# EAGLE board Last (EAGLE 4.16)
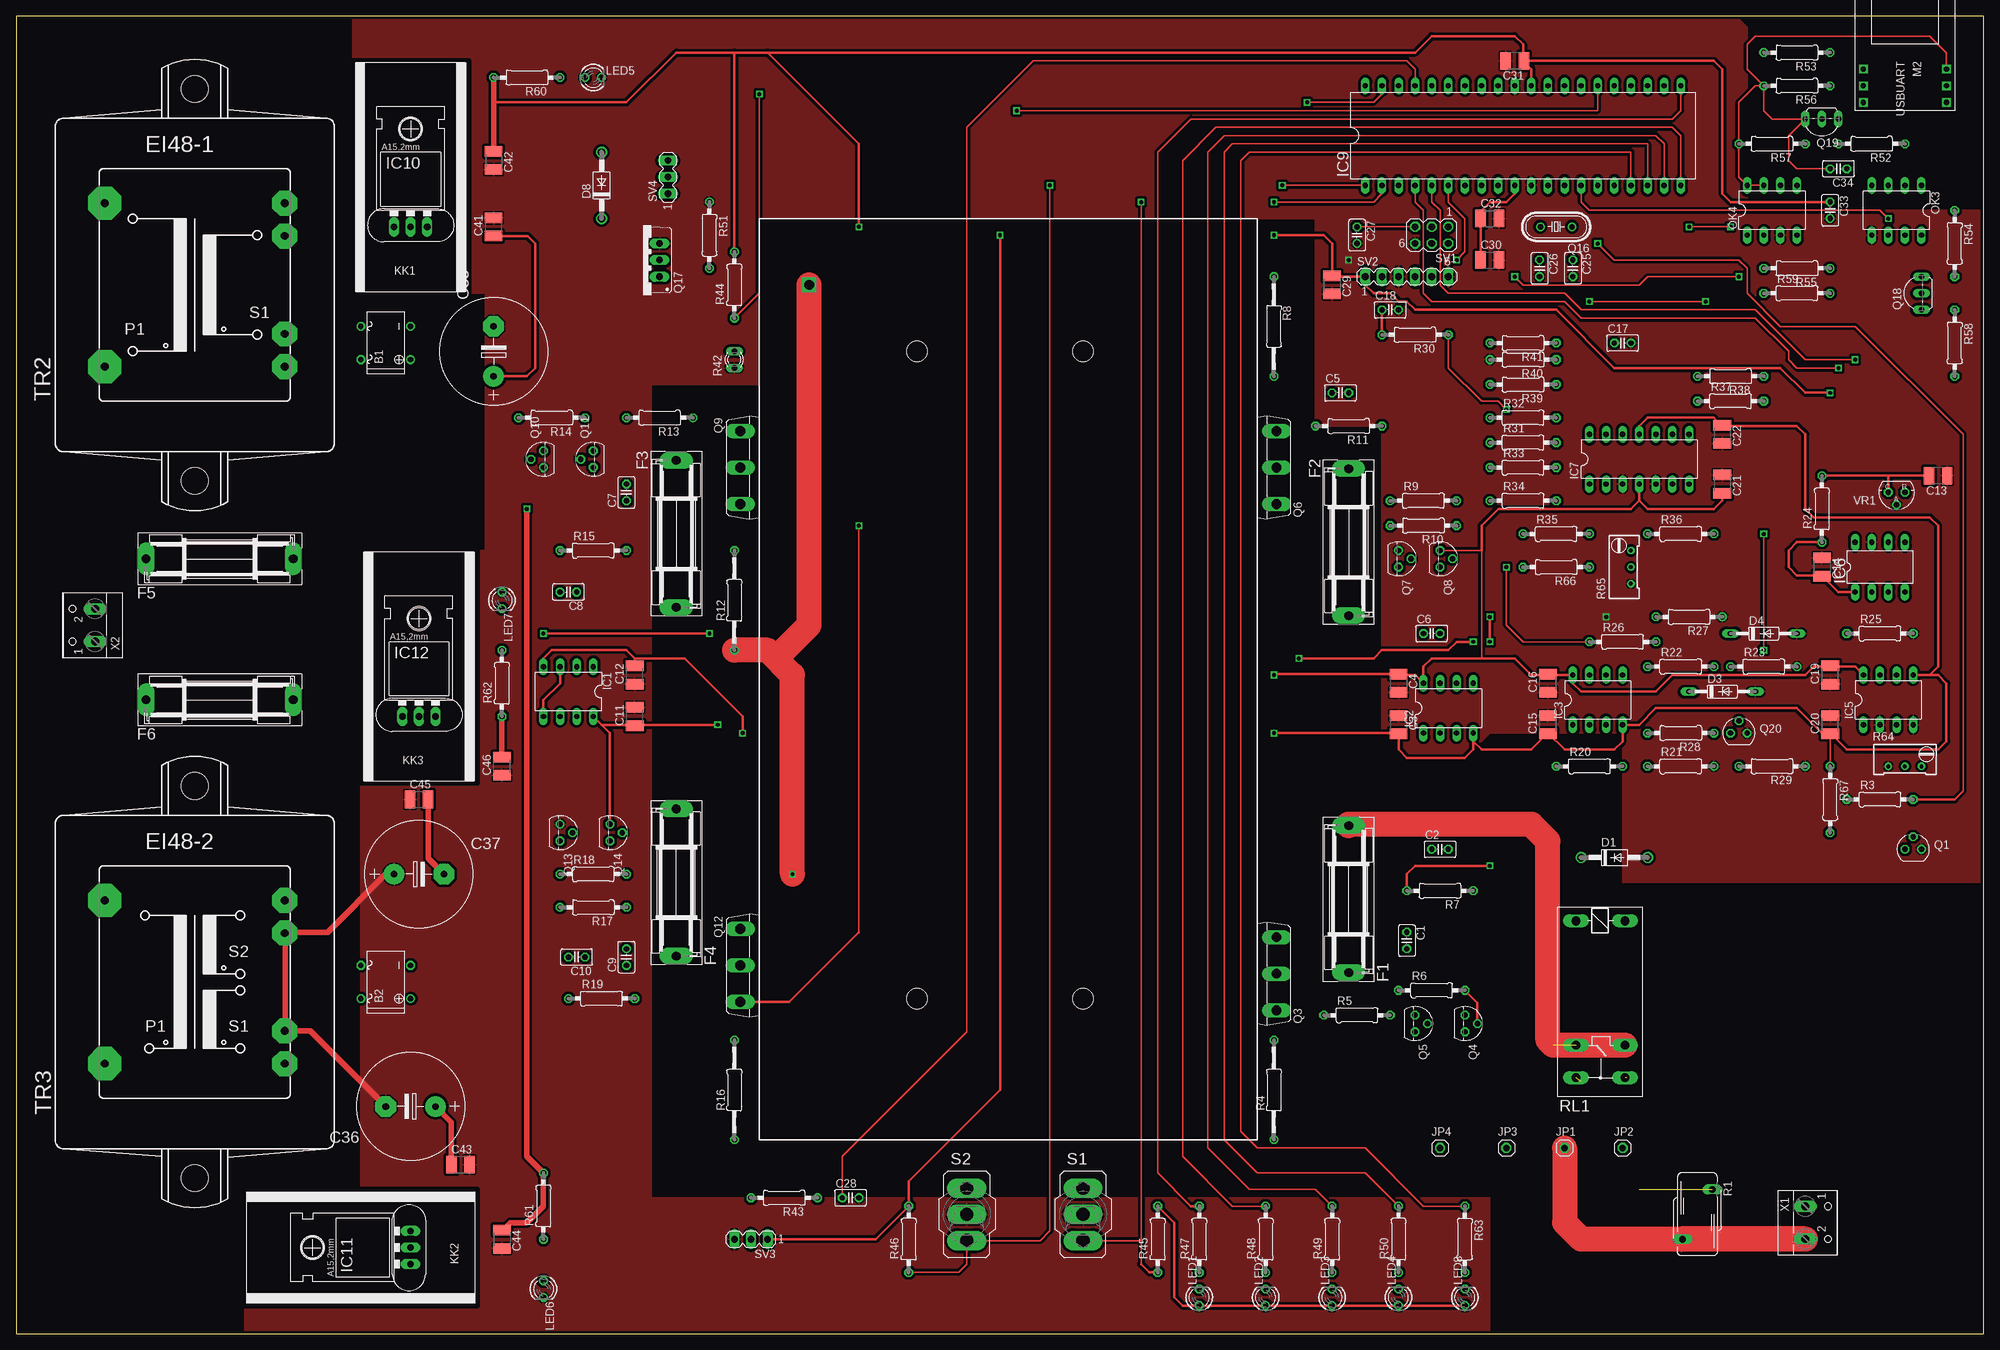
[diagram p0: board, top side]
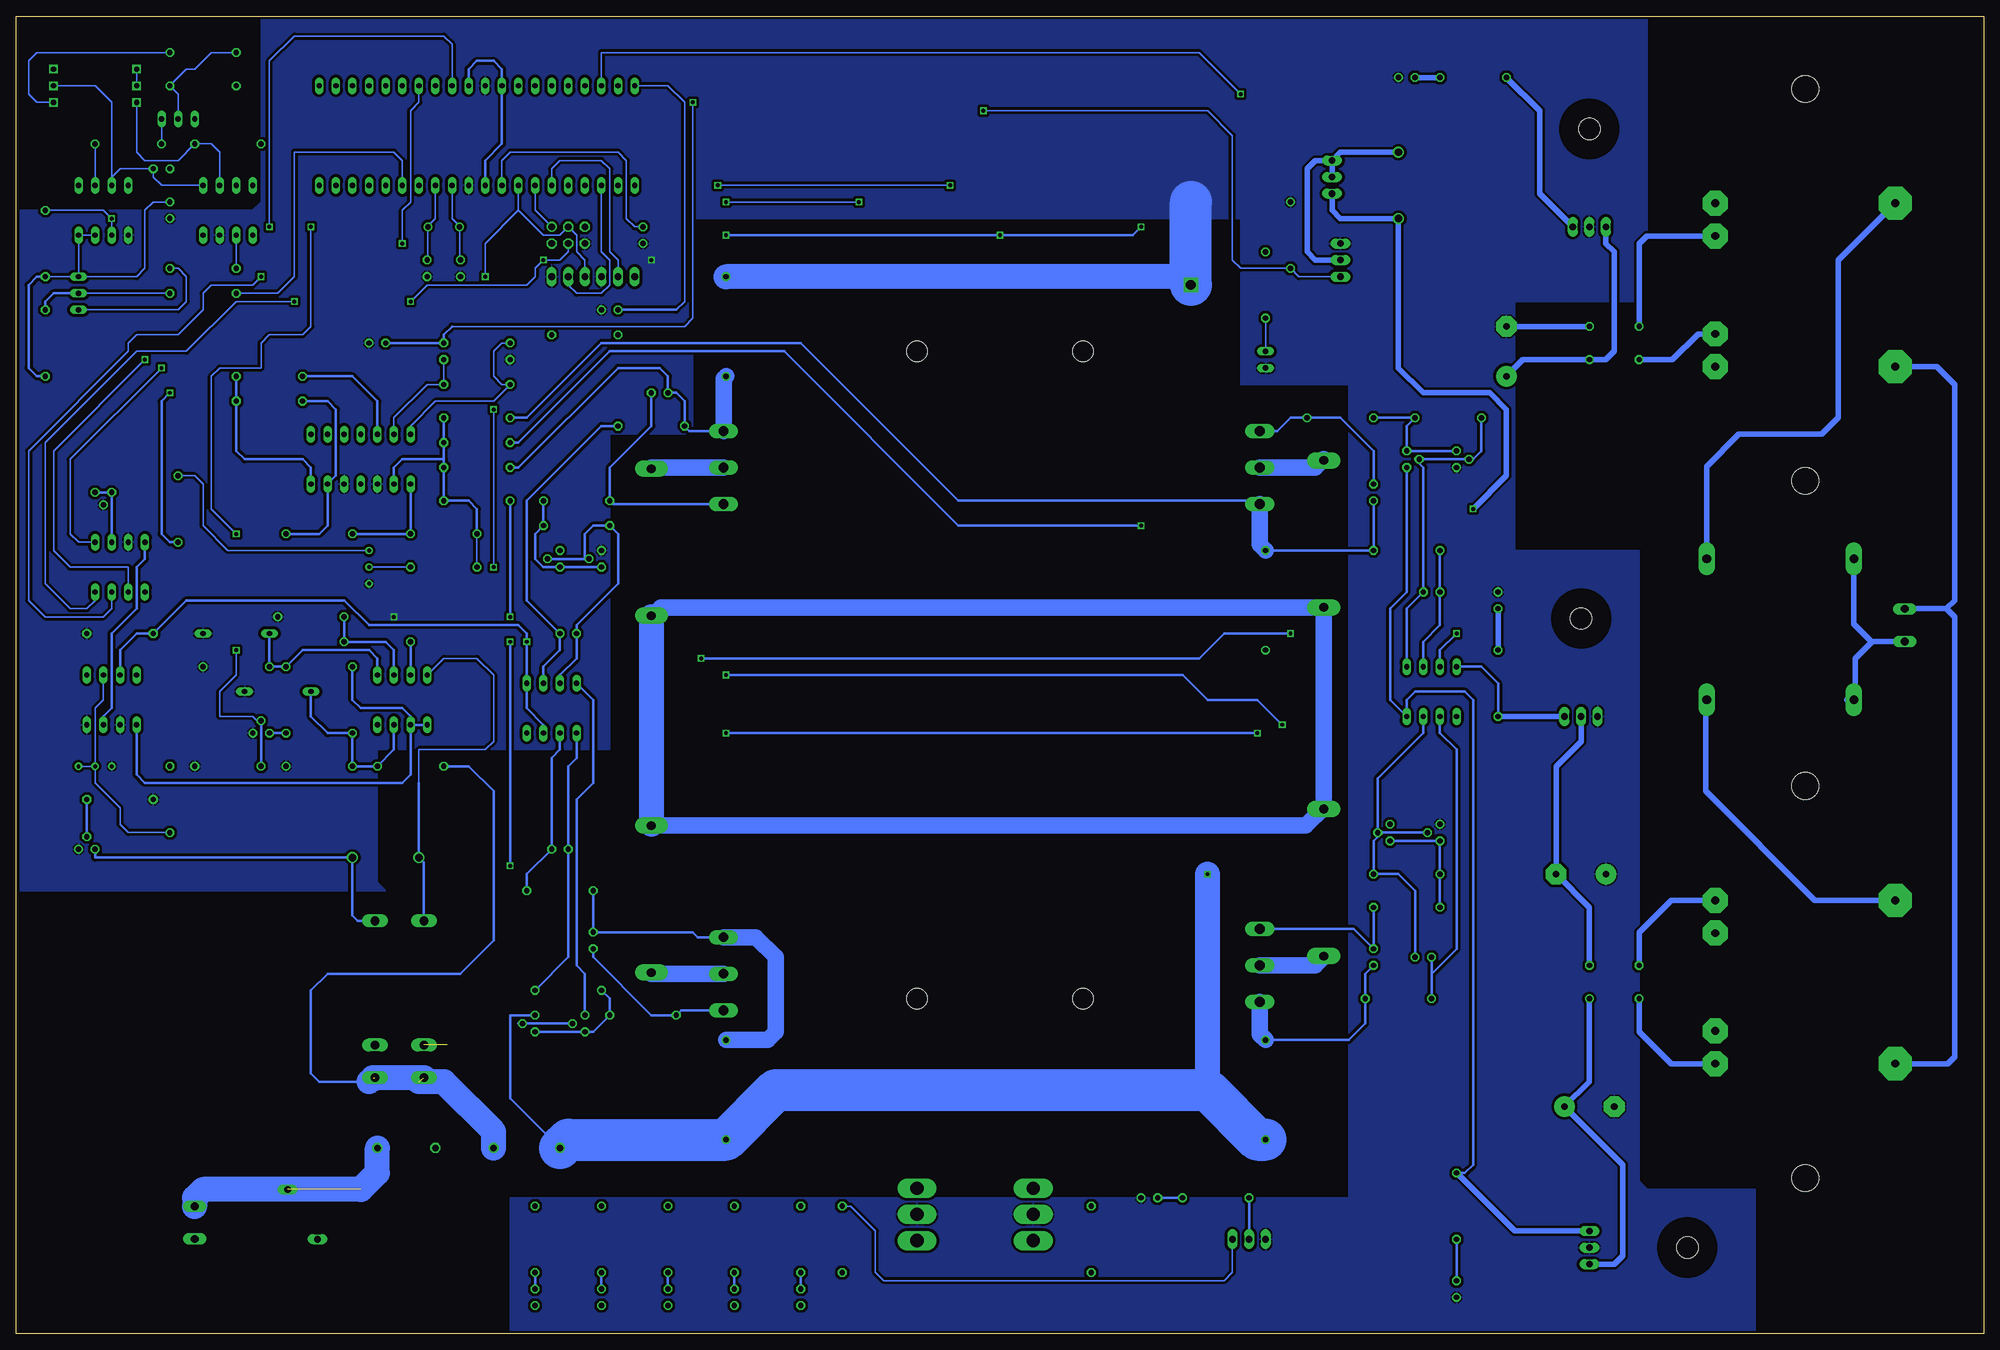
[diagram p1: board, bottom side, seen from below]

Size 300.97 x 201.6 mm. Coordinates in mm from the lower left corner, seen from the top.
Outline: 0,0 300.97,0 300.97,201.6 0,201.6 0,0
Copper layers (1*16): Top 0.035mm / dielectric 1.5mm / Bottom 0.035mm
Design rules "default": minimum track width 10mil, minimum drill 6mil, track to track 6mil, track to pad 6mil, pad to pad 6mil, via to via 6mil, smd to smd 6mil, copper to edge 6mil, drill to drill 6mil, minimum pad ring 10mil, minimum via ring 8mil, stop-mask expansion 4mil, vias tented up to drill 0mil, thermal gap 10mil
Holes 3.2 mm at 137.79,150.33 137.79,51.27 163.19,150.33 163.19,51.27

## Footprints (pad centres in the part's own frame; a part is rotated, then mirrored left to right if it is on the bottom)
B-DIL = drill 0.813 round: + -2.54,-3.81 | drill 0.813 octagon: - 2.54,-3.81; AC1 2.54,3.81; AC2 -2.54,3.81
C025-025X050 = drill 0.813 octagon: 1 -1.27,0; 2 1.27,0
C1210 = smd 1.6 x 2.7: 1 -1.4,0; 2 1.4,0
E7,5-16 = drill 1.016 pad 3.15 round: + -3.81,0 | drill 1.016 pad 3.15 octagon: - 3.81,0
DO41-10 = drill 1.118 round: A 5.08,0; C -5.08,0
DO35Z10 = drill 0.813 long: A 5.08,0; C -5.08,0
SH22,5 = drill 1.321 pad 2.54 long: 1 -11.252,0; 2 11.252,0
DIL08 = drill 0.813 long: 1 -3.81,-3.81; 2 -1.27,-3.81; 3 1.27,-3.81; 4 3.81,-3.81; 5 3.81,3.81; 6 1.27,3.81; 7 -1.27,3.81; 8 -3.81,3.81
DIL8 = drill 0.813 long: 1 -3.81,-3.81; 2 -1.27,-3.81; 3 1.27,-3.81; 4 3.81,-3.81; 5 3.81,3.81; 6 1.27,3.81; 7 -1.27,3.81; 8 -3.81,3.81
DIL14 = drill 0.813 long: 1 -7.62,-3.81; 2 -5.08,-3.81; 3 -2.54,-3.81; 4 0,-3.81; 5 2.54,-3.81; 6 5.08,-3.81; 7 7.62,-3.81; 8 7.62,3.81; 9 5.08,3.81; 10 2.54,3.81; 11 0,3.81; 12 -2.54,3.81; 13 -5.08,3.81; 14 -7.62,3.81
DIL40 = drill 0.813 long: 1 -24.13,-7.62; 2 -21.59,-7.62; 3 -19.05,-7.62; 4 -16.51,-7.62; 5 -13.97,-7.62; 6 -11.43,-7.62; 7 -8.89,-7.62; 8 -6.35,-7.62; 9 -3.81,-7.62; 10 -1.27,-7.62; 11 1.27,-7.62; 12 3.81,-7.62; 13 6.35,-7.62; 14 8.89,-7.62; 15 11.43,-7.62; 16 13.97,-7.62; 17 16.51,-7.62; 18 19.05,-7.62; 19 21.59,-7.62; 20 24.13,-7.62; 21 24.13,7.62; 22 21.59,7.62; 23 19.05,7.62; 24 16.51,7.62; 25 13.97,7.62; 26 11.43,7.62; 27 8.89,7.62; 28 6.35,7.62; 29 3.81,7.62; 30 1.27,7.62; 31 -1.27,7.62; 32 -3.81,7.62; 33 -6.35,7.62; 34 -8.89,7.62; 35 -11.43,7.62; 36 -13.97,7.62; 37 -16.51,7.62; 38 -19.05,7.62; 39 -21.59,7.62; 40 -24.13,7.62
78XXL = drill 1.016 long: GND 0,-3.81; IN -2.54,-3.81; OUT 2.54,-3.81 | hole 3.302: 0,11.176
79XXL = drill 1.016 long: GND -2.54,-3.81; IN 0,-3.81; OUT 2.54,-3.81 | hole 3.302: 0,11.176
1X01 = drill 1.016 octagon: 1 0,0
LED3MM = drill 0.813 octagon: A -1.27,0; K 1.27,0
USBUART = drill 0.8 square: 1 2.54,-6.35; 2 5.08,-6.35; 3 7.62,-6.35; 4 7.62,6.35; 5 5.08,6.35; 6 2.54,6.35
SOT54E = drill 0.813 octagon: D -1.27,0; G 0,1.905; S 1.27,0
TO247BV = drill 1.499 long: D 0,-2.921; G -5.588,-2.921; S 5.588,-2.921
TO92 = drill 0.813 octagon: 1 1.27,0; 2 0,1.905; 3 -1.27,0
HC49/S = drill 0.813 round: 1 -2.413,0; 2 2.413,0
TO220BV = drill 1.016 long: D 0,-2.54; G -2.54,-2.54; S 2.54,-2.54
TO92-EBC = drill 0.813 long: B 0,-1.27; C -2.54,-1.27; E 2.54,-1.27
S10K420 = drill 1.016 long: 1 -2.286,-3.81; 2 2.286,3.81
0207/10 = drill 0.813 octagon: 1 -5.08,0; 2 5.08,0
0207/15 = drill 0.813 octagon: 1 -7.62,0; 2 7.62,0
P640 = drill 0.813 long: 1 -1.27,0; 2 1.27,0
RTRIM64W = drill 0.61 round: 1 1.27,-2.54; 2 1.27,0; 3 1.27,2.54
FIN43619 = drill 1.321 long: 1 2.07,3.047; 2 2.07,10.54; P 21.06,3.047; P@ 21.06,10.54; S 26.064,3.047; S@ 26.064,10.54
320-916 = drill 2.007 long: 1 0,4.013; 2 0,0; 3 0,-4.013
MA03-2 = drill 1.016 round: 1 -2.54,-1.27 | drill 1.016 octagon: 2 -2.54,1.27; 3 0,-1.27; 4 0,1.27; 5 2.54,-1.27; 6 2.54,1.27
MA06-1 = drill 1.016 long: 1 -6.35,0; 2 -3.81,0; 3 -1.27,0; 4 1.27,0; 5 3.81,0; 6 6.35,0
MA03-1 = drill 1.016 long: 1 -2.54,0; 2 0,0; 3 2.54,0
EI48-1B = drill 1.194 pad 5.08 octagon: 1 -13.767,12.497; 6 -13.767,-12.497 | drill 1.194 pad 3.81 octagon: 7 13.767,-12.497; 8 13.767,-7.493; 11 13.767,7.493; 12 13.767,12.497 | hole 4.115: 0,-29.997; 0,29.997
EI48-2B = drill 1.194 pad 5.08 octagon: 1 -13.767,12.497; 6 -13.767,-12.497 | drill 1.194 pad 3.81 octagon: 7 13.767,-12.497; 8 13.767,-7.493; 11 13.767,7.493; 12 13.767,12.497 | hole 4.115: 0,-29.997; 0,29.997
TO92-CLP = drill 0.813 octagon: A 0,1.905; C 1.27,0; R -1.27,0
W237-102 = drill 1.194 long: 1 -2.5,-1.27; 2 2.5,-1.27

## Placement (x,y rotation side)
B1  VM25  [B-DIL]  56.51,151.6 90 top
B2  VM25  [B-DIL]  56.51,53.81 90 top
C1  4n7  [C025-025X050]  212.72,60.16 270 top
C2  2n7  [C025-025X050]  217.8,74.13 0 top
C3  1u  [C1210]  211.45,93.18 270 top
C4  1u  [C1210]  211.45,99.53 270 top
C5  4n7  [C025-025X050]  202.56,143.98 0 top
C6  2n7  [C025-025X050]  216.53,107.15 0 top
C7  4n7  [C025-025X050]  93.34,128.74 90 top
C8  2n7  [C025-025X050]  84.45,113.5 180 top
C9  4n7  [C025-025X050]  93.34,57.62 90 top
C10  2n7  [C025-025X050]  85.72,57.62 180 top
C11  1u  [C1210]  94.61,94.45 90 top
C12  1u  [C1210]  94.61,100.8 90 top
C13  10u  [C1210]  294,131.28 180 top
C14  1u  [C1210]  276.22,117.31 270 top
C15  1u  [C1210]  234.31,93.18 90 top
C16  1u  [C1210]  234.31,99.53 90 top
C17  10n  [C025-025X050]  245.74,151.6 0 top
C18  10n  [C025-025X050]  210.18,156.68 0 top
C19  1u  [C1210]  277.49,100.8 90 top
C20  1u  [C1210]  277.49,93.18 90 top
C21  1u  [C1210]  260.98,130.01 270 top
C22  1u  [C1210]  260.98,137.63 270 top
C25  22p  [C025-025X050]  238.12,163.03 270 top
C26  22p  [C025-025X050]  233.04,163.03 270 top
C27  100n  [C025-025X050]  205.1,168.11 270 top
C28  100n  [C025-025X050]  127.63,20.79 0 top
C29  10u  [C1210]  201.29,160.49 270 top
C30  1u  [C1210]  225.42,164.3 0 top
C31  1u  [C1210]  229.23,194.78 180 top
C32  1u  [C1210]  225.42,170.65 0 top
C33  100n  [C025-025X050]  277.49,171.92 270 top
C34  100n  [C025-025X050]  278.76,178.27 180 top
C35  2200u/35  [E7,5-16]  73.02,150.33 90 top
C36  2200u/35  [E7,5-16]  60.32,34.76 180 top
C37  2200u/35  [E7,5-16]  61.59,70.32 0 top
C41  10u  [C1210]  73.02,169.38 90 top
C42  10u  [C1210]  73.02,179.54 270 top
C43  10u  [C1210]  67.94,25.87 0 top
C44  10u  [C1210]  74.29,14.44 270 top
C45  10u  [C1210]  61.59,81.75 0 top
C46  10u  [C1210]  74.29,86.83 90 top
D1  1N4004  [DO41-10]  244.47,72.86 0 top
D3  BZX55C10  [DO35Z10]  260.98,98.26 0 top
D4  BZX55C3V3  [DO35Z10]  267.33,107.15 0 top
D8  1N4004  [DO41-10]  89.53,175.73 90 top
F1  2,5AT  [SH22,5]  203.83,66.51 90 top
F2  2,5AT  [SH22,5]  203.83,121.12 270 top
F3  2,5AT  [SH22,5]  100.96,122.39 270 top
F4  2,5AT  [SH22,5]  100.96,69.05 90 top
F5  100mAT  [SH22,5]  31.11,118.58 0 top
F6  100mAT  [SH22,5]  31.11,96.99 0 top
IC1  TL082P  [DIL08]  84.45,98.26 180 top
IC2  TL082P  [DIL08]  219.07,95.72 0 top
IC3  LT1078  [DIL08]  241.93,96.99 0 top
IC5  AD633  [DIL08]  286.38,96.99 0 top
IC6  MCP4921  [DIL8]  285.11,117.31 0 top
IC7  LT1079  [DIL14]  248.28,133.82 0 top
IC9  MEGA32-P  [DIL40]  230.5,183.35 0 top
IC10  7805  [78XXL]  60.32,173.19 0 top
IC11  7812  [78XXL]  56.51,13.17 90 top
IC12  7912  [79XXL]  61.59,98.26 0 top
JP1  [1X01]  236.85,28.41 0 top
JP2  [1X01]  245.74,28.41 0 top
JP3  [1X01]  227.96,28.41 0 top
JP4  [1X01]  217.8,28.41 0 top
KK1  SK13/35  [SK13/35]  60.32,173.19 270 top
KK2  SK13/35  [SK13/35]  56.51,13.17 0 top
KK3  SK13/35  [SK13/35]  61.59,98.26 270 top
LED1  [LED3MM]  180.97,5.55 90 top
LED2  [LED3MM]  191.13,5.55 90 top
LED3  [LED3MM]  201.29,5.55 90 top
LED4  [LED3MM]  211.45,5.55 90 top
LED5  [LED3MM]  88.26,192.24 0 top
LED6  [LED3MM]  80.64,6.82 270 top
LED7  [LED3MM]  74.29,112.23 270 top
LED8  [LED3MM]  221.61,5.55 90 top
M2  USBUART  [USBUART]  288.92,196.05 270 top
OK3  6N137  [DIL08]  287.65,171.92 180 top
OK4  6N137  [DIL08]  268.6,171.92 0 top
Q1  BS170  [SOT54E]  290.19,74.13 0 top
Q3  SPW32N50C3  [TO247BV]  189.86,55.08 90 top
Q4  BC557  [TO92]  221.61,47.46 270 top
Q5  BC547B  [TO92]  213.99,47.46 270 top
Q6  SPW32N50C3  [TO247BV]  189.86,132.55 90 top
Q7  BC557  [TO92]  211.45,118.58 270 top
Q8  BC547B  [TO92]  217.8,118.58 270 top
Q9  SPW32N50C3  [TO247BV]  113.66,132.55 270 top
Q10  BC557  [TO92]  80.64,133.82 90 top
Q11  BC547B  [TO92]  88.26,133.82 90 top
Q12  SPW32N50C3  [TO247BV]  113.66,56.35 270 top
Q13  BC557  [TO92]  83.18,76.67 270 top
Q14  BC547B  [TO92]  90.8,76.67 270 top
Q16  16MHz  [HC49/S]  235.58,169.38 180 top
Q17  IRF540  [TO220BV]  95.88,164.3 90 top
Q18  BC557C  [TO92-EBC]  290.19,159.22 90 top
Q19  BC557C  [TO92-EBC]  276.22,184.62 180 top
Q20  BS170  [SOT54E]  263.52,91.91 0 top
R1  B72214-S42  [S10K420]  257.17,18.25 180 top
R3  10k  [0207/10]  285.11,81.75 0 top
R4  0,1/1W  [0207/15]  192.4,37.3 90 top
R5  10  [0207/10]  205.1,48.73 0 top
R6  68  [0207/10]  216.53,52.54 0 top
R7  10k  [0207/10]  217.8,67.78 180 top
R8  0,1/1W  [0207/15]  192.4,154.14 270 top
R9  10  [0207/10]  215.26,127.47 0 top
R10  68  [0207/10]  215.26,123.66 180 top
R11  10k  [0207/10]  203.83,138.9 180 top
R12  0,1/1W  [0207/15]  109.85,112.23 90 top
R13  10  [0207/10]  98.42,140.17 180 top
R14  68  [0207/10]  81.91,140.17 180 top
R15  10k  [0207/10]  88.26,119.85 0 top
R16  0,1/1W  [0207/15]  109.85,37.3 90 top
R17  10  [0207/10]  88.26,65.24 180 top
R18  68  [0207/10]  88.26,70.32 0 top
R19  10k  [0207/10]  89.53,51.27 0 top
R20  470k 0,1%  [0207/10]  240.66,86.83 0 top
R21  82k 0,1%  [0207/10]  254.63,86.83 0 top
R22  9k  [0207/10]  254.63,102.07 0 top
R23  1k  [0207/10]  267.33,102.07 0 top
R24  10k  [0207/10]  276.22,126.2 90 top
R25  10k  [0207/10]  285.11,107.15 0 top
R26  22,6k  [0207/10]  245.74,105.88 0 top
R27  10k  [0207/10]  255.9,109.69 180 top
R28  7,87k 1%  [0207/10]  254.63,91.91 180 top
R29  10k  [0207/10]  268.6,86.83 180 top
R30  10k  [0207/10]  213.99,152.87 180 top
R31  10k  [0207/10]  230.5,136.36 0 top
R32  10k  [0207/10]  230.5,140.17 0 top
R33  10k  [0207/10]  230.5,132.55 0 top
R34  10k  [0207/10]  230.5,127.47 0 top
R35  10k  [0207/10]  235.58,122.39 0 top
R36  10k  [0207/10]  254.63,122.39 0 top
R37  10k  [0207/10]  262.25,142.71 0 top
R38  10k  [0207/10]  262.25,146.52 180 top
R39  33k  [0207/10]  230.5,145.25 180 top
R40  10k  [0207/10]  230.5,149.06 180 top
R41  10k  [0207/10]  230.5,151.6 180 top
R42  SAA965  [P640]  109.85,149.06 90 top
R43  10k  [0207/10]  117.47,20.79 180 top
R44  1k  [0207/10]  109.85,160.49 90 top
R45  1k  [0207/10]  174.62,14.44 90 top
R46  1k  [0207/10]  136.52,14.44 90 top
R47  2k2  [0207/10]  180.97,14.44 90 top
R48  2k2  [0207/10]  191.13,14.44 90 top
R49  2k2  [0207/10]  201.29,14.44 90 top
R50  2k2  [0207/10]  211.45,14.44 90 top
R51  10k  [0207/10]  106.04,168.11 270 top
R52  470  [0207/10]  283.84,182.08 180 top
R53  10k  [0207/10]  272.41,196.05 180 top
R54  1k  [0207/10]  296.54,166.84 270 top
R55  470  [0207/10]  272.41,163.03 180 top
R56  10k  [0207/10]  272.41,190.97 180 top
R57  1k  [0207/10]  268.6,182.08 180 top
R58  10k  [0207/10]  296.54,151.6 270 top
R59  10k  [0207/10]  272.41,159.22 0 top
R60  2k2  [0207/10]  78.1,192.24 180 top
R61  10k  [0207/10]  80.64,19.52 90 top
R62  10k  [0207/10]  74.29,99.53 90 top
R63  2k2  [0207/10]  221.61,14.44 270 top
R64  100  [RTRIM64W]  288.92,88.1 270 top
R65  100k  [RTRIM64W]  245.74,117.31 0 top
R66  470k  [0207/10]  235.58,117.31 180 top
R67  100k  [0207/10]  277.49,81.75 270 top
RL1  FIN43619  [FIN43619]  235.58,65.24 270 top
S1  [320-916]  163.19,18.25 0 top
S2  [320-916]  145.41,18.25 0 top
SV1  [MA03-2]  216.53,168.11 180 top
SV2  [MA06-1]  212.72,161.76 0 top
SV3  [MA03-1]  112.39,14.44 180 top
SV4  [MA03-1]  99.69,177 90 top
TR2  230V/8V 10VA  [EI48-1B]  27.3,160.49 0 top
TR3  230V/ 2* 12V 10VA  [EI48-2B]  27.3,53.81 0 top
VR1  TL431  [TO92-CLP]  287.65,128.74 180 top
X1  [W237-102]  274.95,16.98 270 top
X2  [W237-102]  10.79,108.42 90 top

## Library data of the parts
B1 B2 = rectifier
C1-C22 C25-C37 C41-C46 R3-R41 R43-R67 = rcl
D1 D3 D4 D8 = diode
F1-F6 = fuse
IC1-IC3 IC7 = linear
IC5 = analog-devices
IC6 = microchip
IC9 = atmel
IC10-IC12 VR1 = v-reg
JP1-JP4 = pinhead
KK1-KK3 = heatsink
LED1-LED8 = led
M2 = special
OK3 OK4 = optocoupler
Q1 Q20 = transistor-small-signal
Q3 Q6 Q9 Q12 Q17 = transistor-power
Q4 Q7 Q10 Q13 Q18 Q19 = transistor-pnp
Q5 Q8 Q11 Q14 = transistor-npn
Q16 = crystal
R1 = varistor
R42 = ptc-ntc
RL1 = relay
S1 S2 = switch
SV1-SV4 = con-lstb
TR2 TR3 = trafo
X1 X2 = con-wago-500

## Nets
+5V: C14.2 C29.1 C30.1 C31.1 C32.1 C33.1 C42.1 IC6.1 IC9.10 IC9.30 IC9.32 IC10.OUT LED1.A LED2.A LED3.A LED4.A LED8.A OK3.7 OK3.8 Q18.E R24.1 R44.2 R45.2 R46.2 R54.2 R58.2 R60.2 SV2.1 SV3.1
+12V: C4.1 C11.1 C16.2 C19.2 C21.2 C44.1 D1.C D8.C IC1.8 IC2.8 IC3.8 IC5.8 IC7.4 IC11.OUT Q5.3 Q8.3 Q11.3 Q14.3 R61.2 RL1.1 SV4.1
-12V: C3.2 C12.2 C15.1 C20.1 C22.1 C46.2 IC1.4 IC2.4 IC3.4 IC5.5 IC7.11 IC12.OUT R62.1 R67.1
CS_DAC: IC6.2 IC9.5
GAIN: IC9.29 Q20.G R29.2
GND: B1.- C3.1 C4.2 C11.2 C12.1 C13.1 C14.1 C15.2 C16.1 C17.2 C18.2 C19.1 C20.2 C21.1 C22.2 C25.2 C26.2 C27.2 C28.2 C29.2 C30.2 C31.2 C32.2 C33.2 C35.- C36.- C37.+ C41.2 C42.2 C43.2 C44.2 C45.1 C46.1 D3.A D4.A IC5.2 IC5.4 IC6.7 IC7.3 IC7.5 IC9.11 IC9.31 IC10.GND IC11.GND IC12.GND JP4.1 LED5.K LED6.K LED7.A OK3.5 OK4.3 Q1.S Q4.3 Q7.3 Q10.3 Q13.3 Q17.S Q20.S R3.1 R4.1 R8.1 R12.1 R16.1 R21.2 R23.2 R25.2 R27.1 R29.1 R40.2 R42.1 R51.1 R64.1 R65.1 S1.2 S2.2 SV1.6 SV2.3 SV2.6 SV3.3 TR3.8 TR3.11 VR1.A
I1IST: C9.1 Q12.S R16.2 R19.2 R31.1
I2IST: C7.1 Q9.S R12.2 R15.2 R32.1
I3IST: C5.1 Q6.S R8.2 R11.2 R33.1
I4IST: C1.1 Q3.S R4.2 R7.2 R34.1
IIST_ADC: C17.1 IC9.39 R41.1
ISOLL: IC1.3 IC1.5 IC2.3 IC2.5 IC5.7 R25.1
LDAC: IC6.5 IC9.4
MISO: IC9.7 SV1.1
MOSI: IC6.4 IC9.6 SV1.4 SV2.2
N$1: JP2.1 R1.1 X1.1
N$2: JP1.1 R1.2 X1.2
N$4: D1.A Q1.D RL1.2
N$6: IC5.6 R64.2 R64.3 R67.2
N$7: IC9.38 R42.2 R44.1
N$8: F1.1 Q3.D
N$10: D3.C IC3.3 R20.2 R21.1 R28.2
N$11: C1.2 Q3.G R5.1
N$12: Q4.1 Q5.1 R5.2 R6.1
N$13: C2.1 IC2.1 Q4.2 Q5.2 R6.2
N$14: Q20.D R28.1
N$15: C2.2 IC2.2 R7.1
N$16: F2.1 Q6.D
N$17: IC3.1 IC3.2 IC5.1 R22.1
N$18: C5.2 Q6.G R9.1
N$19: Q7.1 Q8.1 R9.2 R10.1
N$20: C6.1 IC2.7 Q7.2 Q8.2 R10.2
N$21: C6.2 IC2.6 R11.1
N$22: F3.1 Q9.D
N$23: D4.C IC3.5 R22.2 R23.1
N$24: C7.2 Q9.G R13.1
N$25: Q10.1 Q11.1 R13.2 R14.1
N$26: C8.1 IC1.1 Q10.2 Q11.2 R14.2
N$27: C8.2 IC1.2 R15.1
N$28: F4.1 Q12.D
N$29: IC5.3 IC6.8
N$30: C9.2 Q12.G R17.1
N$31: Q13.1 Q14.1 R17.2 R18.1
N$32: C10.1 IC1.7 Q13.2 Q14.2 R18.2
N$33: C10.2 IC1.6 R19.1
N$34: IC7.2 R31.2 R32.2 R33.2 R34.2 R35.1 R66.2
N$35: R65.2 R66.1
N$36: IC7.1 R35.2 R36.1
N$37: IC3.6 R26.2 R27.2
N$38: IC3.7 R26.1 R30.1
N$39: IC7.6 R36.2 R37.1
N$40: IC9.2 R45.1 S1.3
N$41: IC7.7 R37.2 R38.1
N$42: IC7.12 R38.2
N$44: IC7.13 R39.1 R40.1
N$45: IC7.14 R39.2 R41.2
N$46: R43.2 SV3.2
N$47: C28.1 IC9.37 R43.1
N$48: IC9.1 R46.1 S2.3
N$49: C26.1 IC9.12 Q16.2
N$50: C25.1 IC9.13 Q16.1
N$51: D8.A Q17.D SV4.2 SV4.3
N$52: C27.1 IC9.9 SV1.5
N$53: IC9.3 SV2.5
N$54: IC9.17 R63.1
N$55: IC9.26 Q17.G R51.2
N$56: LED1.K R47.1
N$57: IC9.21 R47.2
N$58: IC9.20 R48.2
N$59: LED2.K R48.1
N$60: IC9.19 R49.2
N$61: LED3.K R49.1
N$62: IC9.18 R50.2
N$63: LED4.K R50.1
N$64: Q19.C R52.2
N$65: C34.2 M2.6 OK4.7 OK4.8 Q19.E R56.2 R57.2
N$66: OK3.2 R52.1
N$67: M2.3 OK4.6 R57.1
N$68: Q19.B R53.2 R56.1
N$69: M2.4 R53.1
N$70: M2.1 M2.2
N$71: C34.1 M2.5 OK3.3 OK4.5
N$72: Q18.B R58.1 R59.2
N$73: OK4.2 R55.2
N$74: Q18.C R55.1
N$75: F5.1 F6.1 X2.1
N$76: F5.2 TR2.1
N$77: F6.2 TR3.1
N$78: TR2.6 TR3.6 X2.2
N$79: B1.AC1 TR2.11
N$80: B1.AC2 TR2.8
N$81: LED5.A R60.1
N$82: B1.+ C35.+ C41.1 IC10.IN
N$83: LED6.A R61.1
N$84: LED7.K R62.2
N$85: LED8.K R63.2
N$86: B2.AC1 TR3.12
N$87: B2.AC2 TR3.7
N$88: B2.+ C36.+ C43.1 IC11.IN
N$90: B2.- C37.- C45.2 IC12.IN
ON: IC9.27 Q1.G R3.2
RXD: IC9.14 OK3.6 R54.1
SCK: IC6.3 IC9.8 SV1.3 SV2.4
TXD: IC9.15 R59.1
U+: F1.2 F2.2 F3.2 F4.2 RL1.P RL1.P@
UIST: JP3.1 R20.1 RL1.S RL1.S@
UIST_ADC: C18.1 IC9.40 R30.2
VREF: C13.2 IC6.6 R24.2 R65.3 VR1.C VR1.R

## Tracks (layer width: path | path; a pad name or v marks a point on that pad's centre or on a via)
+5V  (via drill 0.6)
  Top 0.406: C33.1 262.25,173.19 260.98,174.46 260.98,193.51 259.71,194.78 C31.1 230.5,194.78 | IC9.30 231.77,193.51 230.5,194.78 | C30.1 224.02,170.52 224.15,170.65 C32.1 224.02,171.79 225.42,173.19 227.96,173.19 229.23,174.46 IC9.10 | 201.29,161.76 C29.1 | 201.29,161.76 SV2.1 206.37,160.49 207.64,159.22 210.18,159.22 211.45,157.95 212.72,157.95 213.99,156.68 235.58,156.68 244.47,147.79 269.87,147.79 273.68,143.98 v277.49,143.98 | 201.29,161.76 201.29,166.84 200.02,168.11 v192.4,168.11 | v128.9,169.38 128.9,182.08 114.93,196.05 | 109.85,196.05 100.96,196.05 93.34,188.43 73.02,188.43 | 109.85,196.05 R44.2 | 114.93,196.05 213.99,196.05 216.53,198.59 229.23,198.59 230.5,197.32 230.5,194.78 | 109.85,196.05 114.93,196.05 | LED8.A LED4.A LED3.A LED2.A LED1.A 178.43,4.28 177.16,5.55 177.16,16.98 R45.2 | v150.49,168.11 150.49,37.3 136.52,23.33 R46.2 131.44,14.44 SV3.1 | IC6.1 278.76,113.5 276.22,116.04 | R24.1 272.41,121.12 271.14,119.85 271.14,117.31 272.41,116.04 276.22,116.04 | 276.22,116.04 C14.2
  Top 0.813: R60.2 73.02,188.43 C42.1
  Bottom 0.254: Q18.E R54.2 | Q18.E OK3.8 OK3.7 | Q18.E 282.57,161.76 281.3,163.03 281.3,171.92 280.03,173.19 C33.1 | R45.2 173.35,19.52 169.54,15.71 169.54,9.36 168.27,8.09 116.2,8.09 114.93,9.36 SV3.1
  Bottom 0.406: IC9.30 231.77,193.51 230.5,194.78 227.96,194.78 226.69,193.51 IC9.32 226.69,182.08 229.23,179.54 IC9.10 | v192.4,168.11 v150.49,168.11 130.17,168.11 v128.9,169.38 | R54.2 297.81,161.76 299.08,160.49 299.08,147.79 297.81,146.52 R58.2 | R24.1 277.49,121.12 278.76,122.39 278.76,142.71 v277.49,143.98
  Bottom 0.813: IC10.OUT 67.94,174.46 67.94,187.16 R60.2
+12V  (via drill 0.6)
  Top 0.254: Q8.3 224.15,119.85 224.15,103.34
  Top 0.406: IC1.8 89.53,93.18 | 89.53,93.18 94.61,93.18 | Q14.3 90.8,91.91 89.53,93.18 | 94.61,93.18 C11.1 | 94.61,93.18 v107.31,93.18 | 234.31,100.8 C16.2 | 234.31,100.8 IC3.8 238.12,99.53 239.39,98.26 250.82,98.26 253.36,100.8 273.68,100.8 274.95,102.07 277.49,102.07 | 234.31,100.8 231.77,100.8 229.23,103.34 224.15,103.34 216.53,103.34 215.26,102.07 IC2.8 213.99,100.8 211.45,100.8 C4.1 192.53,100.93 v192.4,100.8 | IC5.8 281.3,102.07 277.49,102.07 | 277.49,102.07 C19.2 | C21.2 260.98,127.47 259.71,126.2 249.55,126.2 248.28,127.47 | 248.28,127.47 IC7.4 | 248.28,127.47 247.01,126.2 226.69,126.2 224.15,123.66 224.15,119.85
  Top 0.813: C44.1 74.29,15.71 75.56,16.98 78.1,16.98 80.64,19.52 R61.2 78.1,27.14 v78.1,126.2
  Bottom 0.254: 239.39,84.29 239.39,89.37 229.23,89.37 227.96,90.64 227.96,100.8 230.5,103.34 235.58,103.34 IC3.8
  Bottom 0.406: R61.2 79.37,24.6 78.1,25.87 78.1,96.99 79.37,98.26 86.99,98.26 88.26,96.99 IC1.8 90.8,96.99 90.8,110.96 88.26,113.5 Q11.3 | v107.31,93.18 111.12,96.99 118.74,96.99 122.55,100.8 v192.4,100.8 | Q5.3 213.99,55.08 215.26,56.35 215.26,81.75 212.72,84.29 212.72,96.99 IC2.8 | RL1.1 238.63,72.1 D1.C 239.39,84.29
  Bottom 0.813: IC11.OUT 71.75,15.71 R61.2 | SV4.1 99.69,171.92 98.42,170.65 D8.C 89.53,147.79 85.72,143.98 75.56,143.98 73.02,141.44 73.02,131.28 v78.1,126.2
-12V  (via drill 0.6)
  Top 0.254: 260.98,138.9 259.71,140.17 | 277.49,91.91 R67.1
  Top 0.406: 94.61,103.34 C12.2 | 94.61,103.34 93.34,104.61 81.91,104.61 80.64,103.34 IC1.4 | 94.61,103.34 102.23,103.34 111.12,94.45 v111.12,91.91 | 234.31,91.91 231.77,89.37 224.15,89.37 222.88,90.64 IC2.4 222.88,89.37 221.61,88.1 212.72,88.1 211.45,89.37 C3.2 211.45,91.91 v192.4,91.91 | 234.31,91.91 C15.1 | 234.31,91.91 236.85,89.37 244.47,89.37 245.74,90.64 IC3.4 248.28,93.18 250.82,95.72 272.41,95.72 276.22,91.91 277.49,91.91 | 292.73,100.8 294,100.8 295.27,99.53 295.27,90.64 294,89.37 280.03,89.37 277.49,91.91 | 292.73,100.8 IC5.5 | 277.49,91.91 C20.1 | IC7.11 248.28,138.9 249.55,140.17 259.71,140.17 | C22.1 260.98,138.9 272.41,138.9 273.68,137.63 273.68,126.2 274.95,124.93 292.73,124.93 294,123.66 294,102.07 292.73,100.8
  Top 0.813: 74.29,88.1 C46.2 R62.1
  Bottom 0.406: IC1.4 76.83,102.07 74.29,99.53 R62.1 | v192.4,91.91 v111.12,91.91
  Bottom 0.813: R62.1 IC12.OUT
CS_DAC  (via drill 0.6)
  Top 0.254: IC9.5 216.53,173.19 217.8,171.92 217.8,160.49 219.07,159.22 236.85,159.22 239.39,156.68 266.06,156.68 273.68,149.06 v281.3,149.06
  Bottom 0.254: IC6.2 283.84,117.31 292.73,117.31 295.27,119.85 295.27,135.09 v281.3,149.06
GAIN  (via drill 0.6)
  Top 0.254: v255.9,169.38 v262.25,169.38 | v267.33,104.61 v267.33,122.39
  Bottom 0.254: IC9.29 234.31,197.32 235.58,198.59 258.44,198.59 262.25,194.78 v262.25,169.38 | v255.9,169.38 255.9,154.14 257.17,152.87 262.25,152.87 263.52,151.6 263.52,147.79 269.87,147.79 271.14,146.52 271.14,126.2 v267.33,122.39 | v267.33,104.61 267.33,100.8 269.87,98.26 269.87,94.45 264.79,94.45 263.52,93.18
  Bottom 0.406: R29.2 263.52,93.18 Q20.G
GND  (via drill 0.6, 1.5)
  Top 0.406: C32.2 226.69,170.65 226.82,170.52
  Top 0.813: C37.+ 56.51,70.32 47.62,61.43 41.27,61.43 41.14,61.3 | 41.14,61.3 TR3.11 | 41.14,46.32 TR3.8 44.95,46.32 C36.- | 41.14,46.32 41.14,61.3 | 41.14,46.32 41.27,46.19
  Top 2.54: R12.1 117.47,104.61
  Top 3.81: v121.28,160.49 121.28,108.42 117.47,104.61 | R12.1 114.93,104.61 118.74,100.8 v118.74,70.32
  Bottom 0.406: Q4.3 225.42,48.73 225.42,37.3 225.42,36.03 JP4.1
  Bottom 0.813: B1.- C35.-
  Bottom 2.54: v121.28,160.49 122.55,161.76
  Bottom 3.81: 122.55,161.76 R8.1 | v118.74,70.32 118.74,38.57 R16.1
  Bottom 6.452: JP4.1 216.53,29.68 R4.1 184.78,37.3 118.74,37.3 111.12,29.68 R16.1 | v121.28,160.49 121.28,173.19
  other vias: 203.83,164.3 243.2,109.69
  pour Bottom (isolate 0.406): 51.43,201.13 51.43,157.95 71.75,157.95 71.75,119.85 52.7,119.85 52.7,23.33 51.43,22.06 34.92,22.06 34.92,0.47 225.42,0.47 225.42,20.79 97.15,20.79 97.15,145.25 113.66,145.25 113.66,170.65 197.48,170.65 197.48,137.63 210.18,137.63 210.18,89.37 245.74,89.37 245.74,69.05 244.47,67.78 300.35,67.78 300.35,171.92 264.79,171.92 263.52,173.19 263.52,201.13
  pour Top (isolate 0.406): 51.43,201.13 51.43,160.49 52.7,159.22 71.75,159.22 71.75,119.85 52.7,119.85 52.7,22.06 34.92,22.06 34.92,0.47 225.42,0.47 225.42,20.79 97.15,20.79 97.15,145.25 113.66,145.25 113.66,170.65 198.75,170.65 198.75,138.9 208.91,138.9 208.91,88.1 221.61,88.1 225.42,91.91 245.74,91.91 245.74,69.05 300.35,69.05 300.35,171.92 264.79,171.92 264.79,199.86 263.52,201.13
I1IST  (via drill 0.6)
  Top 0.254: v128.9,123.66 128.9,61.43
  Top 0.406: Q12.S 118.23,50.76 128.9,61.43
  Bottom 0.406: R16.2 97.15,44.92 94.61,47.46 R19.2 94.61,55.08 C9.1 | R31.1 224.15,136.36 210.18,150.33 183.51,150.33 156.84,123.66 v128.9,123.66
  Bottom 2.54: Q12.S 110.74,45.81 R16.2
I2IST
  Bottom 0.406: R12.2 R15.2 C7.1 | R32.1 222.88,140.17 211.45,151.6 180.97,151.6 156.84,127.47 112.39,127.47 111.12,126.2 110.74,126.2
  Bottom 2.54: Q9.S 110.74,126.2 110.74,120.74 R12.2
I3IST
  Bottom 0.406: Q6.S 197.99,138.14 R11.2 198.75,142.71 200.02,143.98 C5.1 201.29,146.52 202.56,147.79 208.91,147.79 224.15,132.55 R33.1
  Bottom 2.54: Q6.S 192.78,146.14 R8.2
I4IST  (via drill 0.6)
  Top 0.406: v225.42,105.88 v225.42,109.69 | v225.42,71.59 213.99,71.59 212.72,70.32 R7.2
  Bottom 0.406: R7.2 C1.1 197.48,61.43 196.72,60.67 Q3.S | v225.42,109.69 R34.1 | v225.42,71.59 v225.42,105.88
  Bottom 2.54: R4.2 186.05,44.92 184.78,46.19 184.78,57.62 187.83,60.67 Q3.S
IIST_ADC  (via drill 0.6)
  Top 0.254: v197.48,188.43 207.64,188.43 208.91,189.7 IC9.39
  Bottom 0.254: 234.31,154.14 198.75,154.14 197.48,155.41 v197.48,188.43
  Bottom 0.406: 234.31,154.14 235.58,152.87 R41.1 C17.1
ISOLL  (via drill 0.6)
  Top 0.406: IC1.5 80.64,96.99 83.18,99.53 IC1.3 | v222.88,105.88 220.34,105.88 219.07,104.61 208.91,104.61 207.64,103.34 v196.21,103.34 | v106.04,107.15 v80.64,107.15
  Bottom 0.406: IC1.3 83.18,104.61 v80.64,107.15 | IC2.3 220.34,93.18 222.88,95.72 IC2.5 v222.88,105.88 222.88,107.15 224.15,108.42 247.01,108.42 250.82,112.23 274.95,112.23 R25.1 282.57,107.15 285.11,104.61 IC5.7 | v196.21,103.34 120.01,103.34 116.2,107.15 v106.04,107.15
LDAC  (via drill 0.6)
  Top 0.254: IC9.4 213.99,173.19 215.26,171.92 215.26,159.22 216.53,157.95 236.85,157.95 239.39,155.41 266.06,155.41 271.14,150.33 271.14,149.06 272.41,147.79 v278.76,147.79
  Bottom 0.254: IC6.5 291.46,121.12 292.73,122.39 292.73,133.82 v278.76,147.79
MISO
  Bottom 0.254: IC9.7 221.61,171.92 SV1.1
MOSI  (via drill 0.6)
  Top 0.254: IC9.6 219.07,173.19 221.61,170.65 221.61,165.57 v220.34,164.3 | v240.66,157.95 v258.44,157.95
  Bottom 0.254: SV2.2 208.91,164.3 210.18,165.57 210.18,178.27 211.45,179.54 217.8,179.54 219.07,178.27 IC9.6 | IC6.4 288.92,112.23 290.19,110.96 292.73,110.96 296.54,114.77 296.54,136.36 282.57,150.33 274.95,150.33 267.33,157.95 v258.44,157.95 | SV1.4 216.53,165.57 217.8,164.3 v220.34,164.3 221.61,163.03 221.61,161.76 222.88,160.49 238.12,160.49 v240.66,157.95
N$1  (1 unrouted)
  Bottom 3.81: X1.1 273.68,20.79 272.41,22.06 248.28,22.06 245.74,24.6 JP2.1
N$2
  Top 3.81: R1.2 254.63,14.44 254.67,14.48 X1.2 239.35,14.48 236.85,16.98 JP1.1
N$4
  Bottom 0.406: Q1.D 288.92,72.86 D1.A 249.55,63.97 248.75,63.17 RL1.2
N$6
  Bottom 0.254: R64.2 R64.3 | IC5.6 287.65,96.99 288.92,95.72 R64.2 | R67.2 283.84,76.67 285.11,77.94 285.11,80.48 288.92,84.29 R64.2
N$7  (via drill 0.6)
  Top 0.254: v113.66,189.7 113.66,159.22 R44.1
  Bottom 0.254: R42.2 R44.1 | IC9.38 211.45,196.05 120.01,196.05 v113.66,189.7
N$8
  Bottom 2.54: F1.1 203.83,55.08 Q3.D
N$10
  Bottom 0.406: D3.C 255.9,94.45 253.36,91.91 R28.2 R21.1 R20.2 243.2,89.37 IC3.3
N$11
  Bottom 0.406: Q3.G 199.26,49.49 R5.1 203.83,48.73 212.72,57.62 C1.2
N$12
  Bottom 0.406: R6.1 210.18,51.27 R5.2 212.72,46.19 Q5.1 Q4.1
N$13
  Top 0.406: Q4.2 223.51,50.63 R6.2
  Bottom 0.406: Q5.2 Q4.2 224.15,47.46 | R6.2 216.53,57.62 C2.1 216.53,86.83 215.26,88.1 IC2.1
N$14
  Bottom 0.406: R28.1 Q20.D
N$15
  Bottom 0.406: R7.1 222.88,70.32 C2.2 219.07,88.1 217.8,89.37 IC2.2
N$16
  Bottom 2.54: F2.1 203.83,132.55 Q6.D
N$17
  Bottom 0.406: IC3.2 IC3.1 | R22.1 249.55,96.99 248.28,95.72 241.93,95.72 240.66,94.45 IC3.2 | IC5.1 282.57,85.56 281.3,84.29 241.93,84.29 240.66,85.56 IC3.2
N$18
  Bottom 0.406: Q6.G 209.67,126.96 R9.1 210.18,132.55 203.83,138.9 C5.2
N$19
  Bottom 0.406: R9.2 R10.1 221.61,122.39 221.61,118.58 220.34,117.31 Q8.1 Q7.1
N$20
  Bottom 0.406: 213.99,118.58 213.99,122.39 212.72,123.66 R10.2 208.91,122.39 208.91,114.77 215.26,108.42 C6.1 215.26,103.34 217.8,100.8 IC2.7 | 213.99,118.58 Q8.2 | 213.99,118.58 Q7.2
N$21
  Bottom 0.406: IC2.6 220.34,102.07 217.8,104.61 C6.2 222.88,112.23 222.88,127.47 211.45,138.9 R11.1
N$22
  Bottom 2.54: F3.1 100.96,133.82 102.23,132.55 Q9.D
N$23
  Bottom 0.406: D4.C R23.1 R22.2 257.17,104.61 247.01,104.61 245.74,103.34 IC3.5
N$24
  Bottom 0.406: Q9.G 108.07,138.14 106.04,140.17 R13.1 98.42,140.17 93.34,135.09 C7.2
N$25
  Bottom 0.406: R13.2 R14.1 88.26,138.9 Q11.1 Q10.1
N$26
  Bottom 0.406: R14.2 76.83,135.09 78.1,133.82 Q10.2 79.37,133.82 Q11.2 86.99,133.82 85.72,132.55 C8.1 88.26,110.96 IC1.1
N$27
  Bottom 0.406: R15.1 C8.2 83.18,108.42 85.72,105.88 IC1.2
N$28
  Bottom 2.54: F4.1 100.96,57.62 102.23,56.35 Q12.D
N$29
  Bottom 0.406: IC5.3 287.65,94.45 286.38,95.72 286.38,107.15 282.57,110.96 282.57,117.31 281.3,118.58 IC6.8
N$30
  Bottom 0.406: Q12.G 96.39,61.94 C9.2 R17.1
N$31
  Bottom 0.406: R17.2 R18.1 Q13.1 Q14.1
N$32
  Bottom 0.406: 92.07,76.67 93.34,75.4 R18.2 89.53,70.32 86.99,67.78 C10.1 | 92.07,76.67 Q13.2 | IC1.7 85.72,91.91 92.7,84.92 Q14.2 92.07,76.67
N$33
  Bottom 0.406: C10.2 R19.1 84.45,55.08 80.64,58.89 80.64,89.37 83.18,91.91 IC1.6
N$34
  Bottom 0.254: R66.2 R35.1
  Bottom 0.406: R31.2 R32.2 235.58,133.82 | 235.58,133.82 R33.2 R34.2 231.77,127.47 230.5,126.2 R35.1 | IC7.2 243.2,132.55 241.93,133.82 235.58,133.82
N$35
  Bottom 0.254: R66.1 R65.2
N$36
  Bottom 0.406: IC7.1 R35.2 R36.1
N$37
  Bottom 0.406: IC3.6 243.2,104.61 244.47,105.88 R26.2 R27.2
N$38  (via drill 0.6)
  Top 0.254: R26.1 230.5,105.88 227.96,108.42 v227.96,117.31 | v227.96,141.44 226.69,142.71 224.15,142.71 219.07,147.79 R30.1
  Bottom 0.254: v227.96,117.31 v227.96,141.44
  Bottom 0.406: R26.1 IC3.7
N$39
  Bottom 0.406: R36.2 254.63,122.39 253.36,123.66 IC7.6 252.09,131.28 252.09,141.44 253.36,142.71 R37.1
N$40  (via drill 0.6)
  Top 0.254: v172.08,173.19 172.08,14.44 | 172.08,14.44 172.08,10.63 | v192.4,173.19 207.64,173.19 208.91,174.46 IC9.2 | S1.3 171.88,14.24 172.08,14.44
  Top 0.406: R45.1 173.35,9.36 172.08,10.63
  Bottom 0.254: v172.08,173.19 v192.4,173.19
N$41
  Bottom 0.406: R38.1 R37.2 267.33,135.09 266.06,133.82 257.17,133.82 255.9,132.55 IC7.7
N$42
  Top 0.254: R38.2 256.84,146.19
  Bottom 0.406: IC7.12 245.74,142.71 249.55,146.52 R38.2
N$44
  Bottom 0.254: R40.1 R39.1 238.12,145.25 243.2,140.17 IC7.13
N$45
  Bottom 0.254: R41.2 226.69,151.6 227.96,150.33 227.96,146.52 226.69,145.25 R39.2 227.96,142.71 236.85,142.71 240.66,138.9 IC7.14
N$46
  Bottom 0.406: SV3.2 R43.2
N$47
  Top 0.254: IC9.37 213.99,193.51 212.72,194.78 155.57,194.78 145.41,184.62 145.41,46.19 135.25,36.03 126.36,27.14 C28.1
  Bottom 0.406: C28.1 R43.1
N$48  (via drill 0.6)
  Top 0.254: v158.11,175.73 158.11,15.71 156.64,14.24 S2.3 | v193.67,175.73 IC9.1 | R46.1 144.14,9.36 145.41,10.63 S2.3 | S2.3 145.41,14.44
  Bottom 0.254: v158.11,175.73 v193.67,175.73
N$49
  Bottom 0.254: IC9.12 234.31,170.65 233.04,169.38 Q16.2 233.17,164.43 C26.1
N$50
  Bottom 0.254: IC9.13 236.85,170.65 238.12,169.38 Q16.1 237.99,164.43 C25.1
N$51
  Bottom 0.813: D8.A 98.42,180.81 SV4.3 | SV4.3 SV4.2 | Q17.D 102.23,164.3 103.5,165.57 103.5,178.27 102.23,179.54 SV4.3
N$52
  Top 0.254: C27.1 SV1.5
  Bottom 0.254: IC9.9 226.69,179.54 225.42,180.81 208.91,180.81 207.64,179.54 207.64,170.65 206.37,169.38 C27.1
N$53
  Bottom 0.254: SV2.5 216.53,160.49 215.26,159.22 211.45,159.22 210.18,160.49 210.18,164.3 211.45,165.57 IC9.3
N$54
  Top 0.254: IC9.17 247.01,180.81 188.59,180.81 187.32,179.54 187.32,30.95 189.86,28.41 206.37,28.41 215.26,19.52 R63.1
N$55  (via drill 0.6)
  Top 0.254: IC9.26 241.93,187.16 v153.03,187.16
  Bottom 0.254: Q17.G 104.77,161.76 R51.2 113.66,163.03 114.93,164.3 114.93,183.35 118.74,187.16 v153.03,187.16
N$56
  Bottom 0.406: LED1.K R47.1
N$57
  Top 0.254: IC9.21 254.63,187.16 253.36,185.89 179.7,185.89 174.62,180.81 174.62,24.6 179.7,19.52
  Top 0.406: 179.7,19.52 R47.2
N$58
  Top 0.254: IC9.20 254.63,183.35 253.36,184.62 183.51,184.62 178.43,179.54 178.43,27.14 186.05,19.52 R48.2
N$59
  Bottom 0.406: LED2.K R48.1
N$60
  Top 0.254: IC9.19 252.09,182.08 250.82,183.35 184.78,183.35 182.24,180.81 182.24,28.41 188.59,22.06 198.75,22.06 R49.2
N$61
  Bottom 0.406: LED3.K R49.1
N$62
  Top 0.254: IC9.18 249.55,182.08 186.05,182.08 184.78,180.81 184.78,84.29 184.78,29.68 189.86,24.6 206.37,24.6 R50.2
N$63
  Bottom 0.406: LED4.K R50.1
N$64
  Bottom 0.254: R52.2 Q19.C
N$65
  Top 0.254: M2.6 295.27,196.05 292.73,198.59 266.06,198.59 264.79,197.32 264.79,193.51 R56.2 | R56.2 266.06,190.97 263.52,188.43 R57.2 263.52,177 OK4.8 OK4.7 | R56.2 267.33,187.16 268.6,185.89 Q19.E 271.14,183.35 271.14,179.54 272.41,178.27 C34.2
N$66
  Bottom 0.254: OK3.2 R52.1
N$67
  Bottom 0.254: OK4.6 269.87,180.81 271.14,182.08 R57.1 276.22,179.54 281.3,179.54 282.57,180.81 M2.3
N$68
  Bottom 0.254: R53.2 271.14,196.05 273.68,193.51 274.95,193.51 R56.1 276.22,189.7 Q19.B
N$69
  Bottom 0.254: M2.4 297.81,188.43 299.08,189.7 299.08,194.78 297.81,196.05 R53.1
N$70
  Bottom 0.254: M2.2 M2.1
N$71
  Bottom 0.254: M2.5 288.92,190.97 286.38,188.43 OK3.3 286.38,177 285.11,178.27 C34.1 280.03,177 278.76,175.73 OK4.5
N$72
  Bottom 0.254: R59.2 Q18.B
  Bottom 0.406: Q18.B 295.27,159.22 296.54,157.95 R58.1
N$73
  Bottom 0.254: R55.2 OK4.2
N$74
  Bottom 0.254: R55.1 276.22,163.03 274.95,161.76 274.95,157.95 276.22,156.68 Q18.C
N$75
  Bottom 0.813: X2.1 17.1,105.92 17.14,105.88 | 17.14,105.88 19.68,103.34 19.68,98.26 20.95,96.99 F6.1 | F5.1 19.86,108.6 17.14,105.88
N$76
  Bottom 0.813: F5.2 42.36,132.73 37.46,137.63 24.76,137.63 22.22,140.17 22.22,164.3 TR2.1 13.33,173.19
N$77
  Bottom 0.813: TR3.1 25.83,66.31 42.54,83.02 42.54,96.99 F6.2
N$78
  Bottom 0.813: TR3.6 5.51,41.31 4.44,42.38 4.44,109.69 5.71,110.96 | X2.2 12.06,110.96 5.71,110.96 | TR2.6 7.18,147.99 4.44,145.25 4.44,112.23 5.71,110.96
N$79
  Bottom 0.813: TR2.11 51.56,167.98 52.7,166.84 B1.AC1
N$80
  Bottom 0.813: TR2.8 43.68,153 47.62,149.06 B1.AC2
N$81
  Bottom 0.813: R60.1 LED5.A
N$82
  Top 0.406: C41.1 78.23,167.98 79.37,166.84 79.37,147.79 78.1,146.52 C35.+
  Bottom 0.813: C35.+ 70.48,149.06 B1.+ 57.78,149.06 56.51,150.33 56.51,165.57 57.78,166.84 IC10.IN
N$83
  Bottom 0.406: LED6.A R61.1
N$84
  Bottom 0.813: R62.2 LED7.K
N$85
  Bottom 0.406: LED8.K R63.2
N$86
  Bottom 0.813: TR3.12 47.82,66.31 52.7,61.43 B2.AC1
N$87
  Bottom 0.813: TR3.7 47.82,41.31 52.7,46.19 B2.AC2
N$88
  Top 0.813: C43.1 66.54,32.35 C36.+
  Bottom 0.813: B2.+ 60.32,38.57 C36.+ 55.24,25.87 55.24,11.9 56.51,10.63 IC11.IN
N$90
  Top 0.813: C45.2 62.99,72.73 C37.-
  Bottom 0.813: B2.- 60.32,65.24 C37.- 65.4,86.83 61.59,90.64 IC12.IN
ON  (via drill 0.6)
  Top 0.254: 296.54,81.75 297.81,83.02 297.81,137.63 281.3,154.14 269.87,154.14 264.79,159.22 264.79,163.03 263.52,164.3 244.47,164.3 v241.93,166.84
  Top 0.406: R3.2 296.54,81.75
  Bottom 0.254: v241.93,166.84 241.93,171.92 240.66,173.19 240.66,187.16 239.39,188.43 IC9.27
  Bottom 0.406: Q1.G R3.2
RXD  (via drill 0.6)
  Top 0.254: v286.38,170.65 285.11,171.92 240.66,171.92 239.39,173.19 IC9.14
  Bottom 0.254: R54.1 287.65,171.92 v286.38,170.65 OK3.6
SCK  (via drill 0.6)
  Top 0.254: v263.52,161.76 249.55,161.76 248.28,160.49 230.5,160.49 v229.23,161.76
  Bottom 0.254: SV2.4 213.99,164.3 215.26,165.57 215.26,168.11 SV1.3 217.8,168.11 220.34,168.11 224.15,171.92 | 224.15,171.92 IC9.8 | IC6.3 286.38,110.96 287.65,109.69 296.54,109.69 299.08,112.23 299.08,135.09 283.84,150.33 283.84,151.6 282.57,152.87 276.22,152.87 272.41,156.68 272.41,159.22 271.14,160.49 264.79,160.49 v263.52,161.76 | v229.23,161.76 229.23,166.84 224.15,171.92
TXD
  Bottom 0.254: R59.1 260.98,159.22 258.44,161.76 258.44,180.81 243.2,180.81 241.93,179.54 IC9.15
U+  (1 unrouted)
  Top 3.81: RL1.P@ 235.05,44.18 234.31,44.92 234.31,75.4 231.77,77.94 203.83,77.94 F1.2
  Bottom 2.54: 100.96,80.48 F3.2 202.38,111.14 203.83,109.69 F2.2 | 100.96,80.48 F4.2 | F1.2 103.68,77.76 100.96,80.48
  Bottom 3.81: 203.83,109.69 203.83,77.94
UIST  (2 unrouted)
  Bottom 0.406: R20.1 231.77,86.83 227.96,83.02 227.96,60.16 233.04,55.08 253.36,55.08 255.9,52.54 255.9,39.84 254.63,38.57 247.01,38.57
  Bottom 3.81: JP3.1 227.96,30.95 235.58,38.57 239.39,38.57 | RL1.S 246.4,39.18 247.01,38.57
UIST_ADC  (via drill 0.6)
  Top 0.406: C18.1 R30.2
  Bottom 0.254: 200.02,156.68 198.75,157.95 198.75,188.43 201.29,190.97 IC9.40
  Bottom 0.406: 200.02,156.68 C18.1
  other vias: 208.91,156.68
VREF
  Top 0.406: R24.2 286.38,131.28 | 286.38,131.28 C13.2 | 286.38,131.28 VR1.C
  Bottom 0.254: R65.3 268.6,119.85 272.41,123.66 272.41,130.01 273.68,131.28 R24.2
  Bottom 0.406: IC6.6 VR1.C VR1.R